# EAGLE board v05 (EAGLE 5.09)
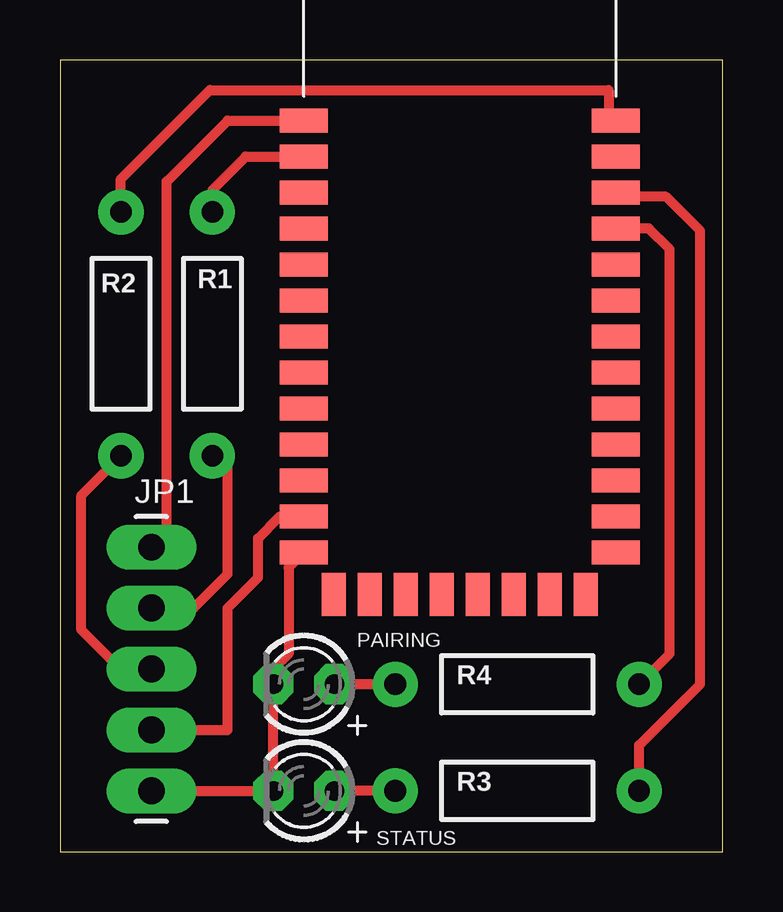
[diagram p0: board, top side]
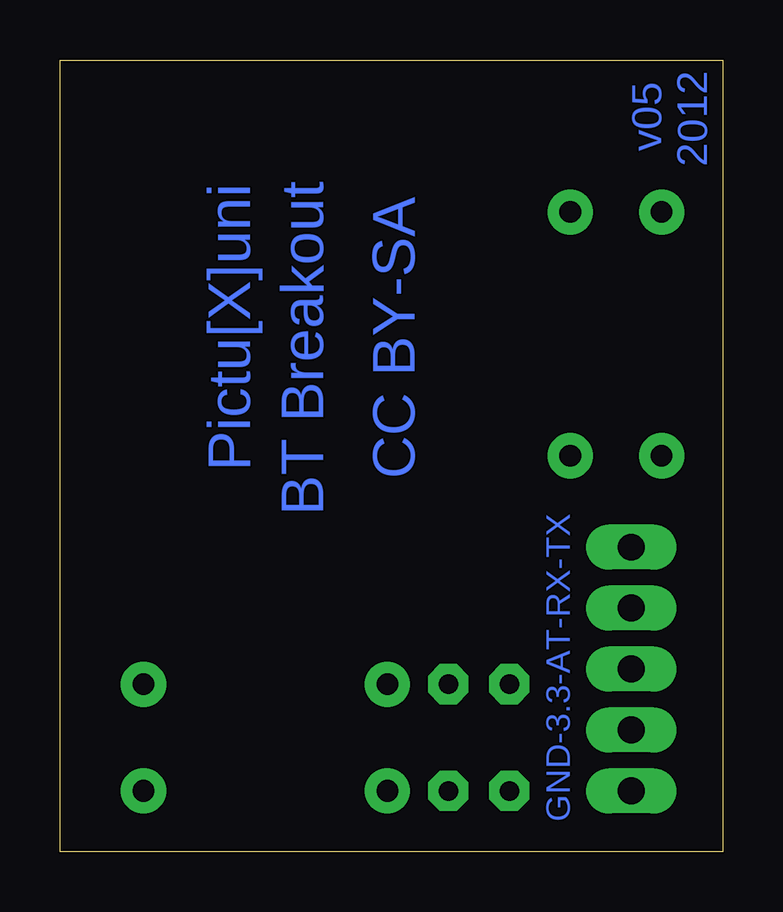
[diagram p1: board, bottom side, seen from below]

Size 27.61 x 33.01 mm. Coordinates in mm from the lower left corner, seen from the top.
Outline: 0,0 27.61,0 27.61,33.01 0,33.01 0,0
Copper layers (1*16): Top 0.035mm / dielectric 1.5mm / Bottom 0.035mm
Design rules "default *": minimum track width 16mil, minimum drill 24mil, track to track 10mil, track to pad 10mil, pad to pad 10mil, via to via 10mil, smd to smd 8mil, copper to edge 40mil, drill to drill 8mil, minimum pad ring 10mil, minimum via ring 8mil, stop-mask expansion 4mil, vias tented up to drill 0mil, thermal gap 10mil

## Footprints (pad centres in the part's own frame; a part is rotated, then mirrored left to right if it is on the bottom)
1X05_LONGPADS = drill 1.118 pad 1.88 long: 1 0,0; 2 2.54,0; 3 5.08,0; 4 7.62,0; 5 10.16,0
LED3MM = drill 0.813 pad 1.676 octagon: A -1.27,0; K 1.27,0
AXIAL-0.4 = drill 0.9 pad 1.88 round: P$1 -5.08,0; P$2 5.08,0
BLUETOOTH_SMD = smd 2 x 1: 1 0,0; 2 0,-1.5; 3 0,-3; 4 0,-4.5; 5 0,-6; 6 0,-7.5; 7 0,-9; 8 0,-10.5; 9 0,-12; 10 0,-13.5; 11 0,-15; 12 0,-16.5; 13 0,-18; 22 13,-18; 23 13,-16.5; 24 13,-15; 25 13,-13.5; 26 13,-12; 27 13,-10.5; 28 13,-9; 29 13,-7.5; 30 13,-6; 31 13,-4.5; 32 13,-3; 33 13,-1.5; 34 13,0 | smd 1 x 1.8: 14 1.25,-19.75; 15 2.75,-19.75; 16 4.25,-19.75; 17 5.75,-19.75; 18 7.25,-19.75; 19 8.75,-19.75; 20 10.25,-19.75; 21 11.75,-19.75

## Placement (x,y rotation side)
JP1  [1X05_LONGPADS]  3.81,12.7 270 top
PAIRING  [LED3MM]  10.16,6.99 180 top
R1  [AXIAL-0.4]  6.35,21.59 270 top
R2  [AXIAL-0.4]  2.54,21.59 90 top
R3  [AXIAL-0.4]  19.05,2.54 0 top
R4  [AXIAL-0.4]  19.05,6.99 0 top
STATUS  [LED3MM]  10.16,2.54 180 top
U1  HC_05  [BLUETOOTH_SMD]  10.16,30.48 0 top

## Library data of the parts
JP1 R1-R4 = SparkFun
PAIRING STATUS = adafruit
U1 = SerialPortBluetooth

## Nets
GND: JP1.5 PAIRING.K STATUS.K U1.13
N$1: R1.P$1 U1.2
N$2: R2.P$2 U1.34
N$3: JP1.2 R1.P$2
N$4: JP1.1 U1.1
N$5: R3.P$2 U1.32
N$6: R4.P$2 U1.31
N$7: R3.P$1 STATUS.A
N$8: PAIRING.A R4.P$1
N$10: JP1.3 R2.P$1
VCC: JP1.4 U1.12

## Tracks (layer width: path | path; a pad name or v marks a point on that pad's centre or on a via)
GND
  Top 0.406: JP1.5 STATUS.K PAIRING.K 8.89,7.62 9.53,8.26 9.53,11.85 U1.13
N$1
  Top 0.406: R1.P$1 6.35,27.59 7.74,28.98 U1.2
N$2
  Top 0.406: R2.P$2 2.54,28.05 6.24,31.75 22.86,31.75 22.86,30.48 U1.34
N$3
  Top 0.406: R1.P$2 6.99,16.51 6.99,11.58 5.56,10.16 JP1.2
N$4
  Top 0.406: JP1.1 4.45,13.34 4.45,27.94 6.99,30.48 U1.1
N$5
  Top 0.406: R3.P$2 24.13,4.45 26.67,6.99 26.67,25.88 25.25,27.3 23.5,27.3 23.32,27.48 U1.32
N$6
  Top 0.406: R4.P$2 25.4,8.26 25.4,25.12 24.54,25.98 U1.31
N$7
  Top 0.406: R3.P$1 STATUS.A
N$8
  Top 0.406: R4.P$1 PAIRING.A
N$10
  Top 0.406: 3.3,8.26 JP1.3 2.52,7.62 0.89,9.25 0.89,14.86 R2.P$1
VCC
  Top 0.406: JP1.4 6.99,5.08 6.99,10.16 8.26,11.43 8.26,13.07 9.15,13.97 U1.12

## Text on the board
Bottom: v05 | 2012 | BT Breakout | CC BY-SA | Pictu[X]uni | GND-3.3-AT-RX-TX
tValues: GND-3.3-AT-RX-TX